# Altium PCB Core.PcbDoc (part 2 of 4)
Units mil, origin at the board's own origin, x right, y up, seen from the top; angles counter-clockwise.
Board outline 3055.22 x 2665.85 mil, 4 copper layers (Top Layer, Layer 1, Layer 2, Bottom Layer), stack 61.583 mil thick; 290 components, 231 nets, 1079 pads, 581 vias.
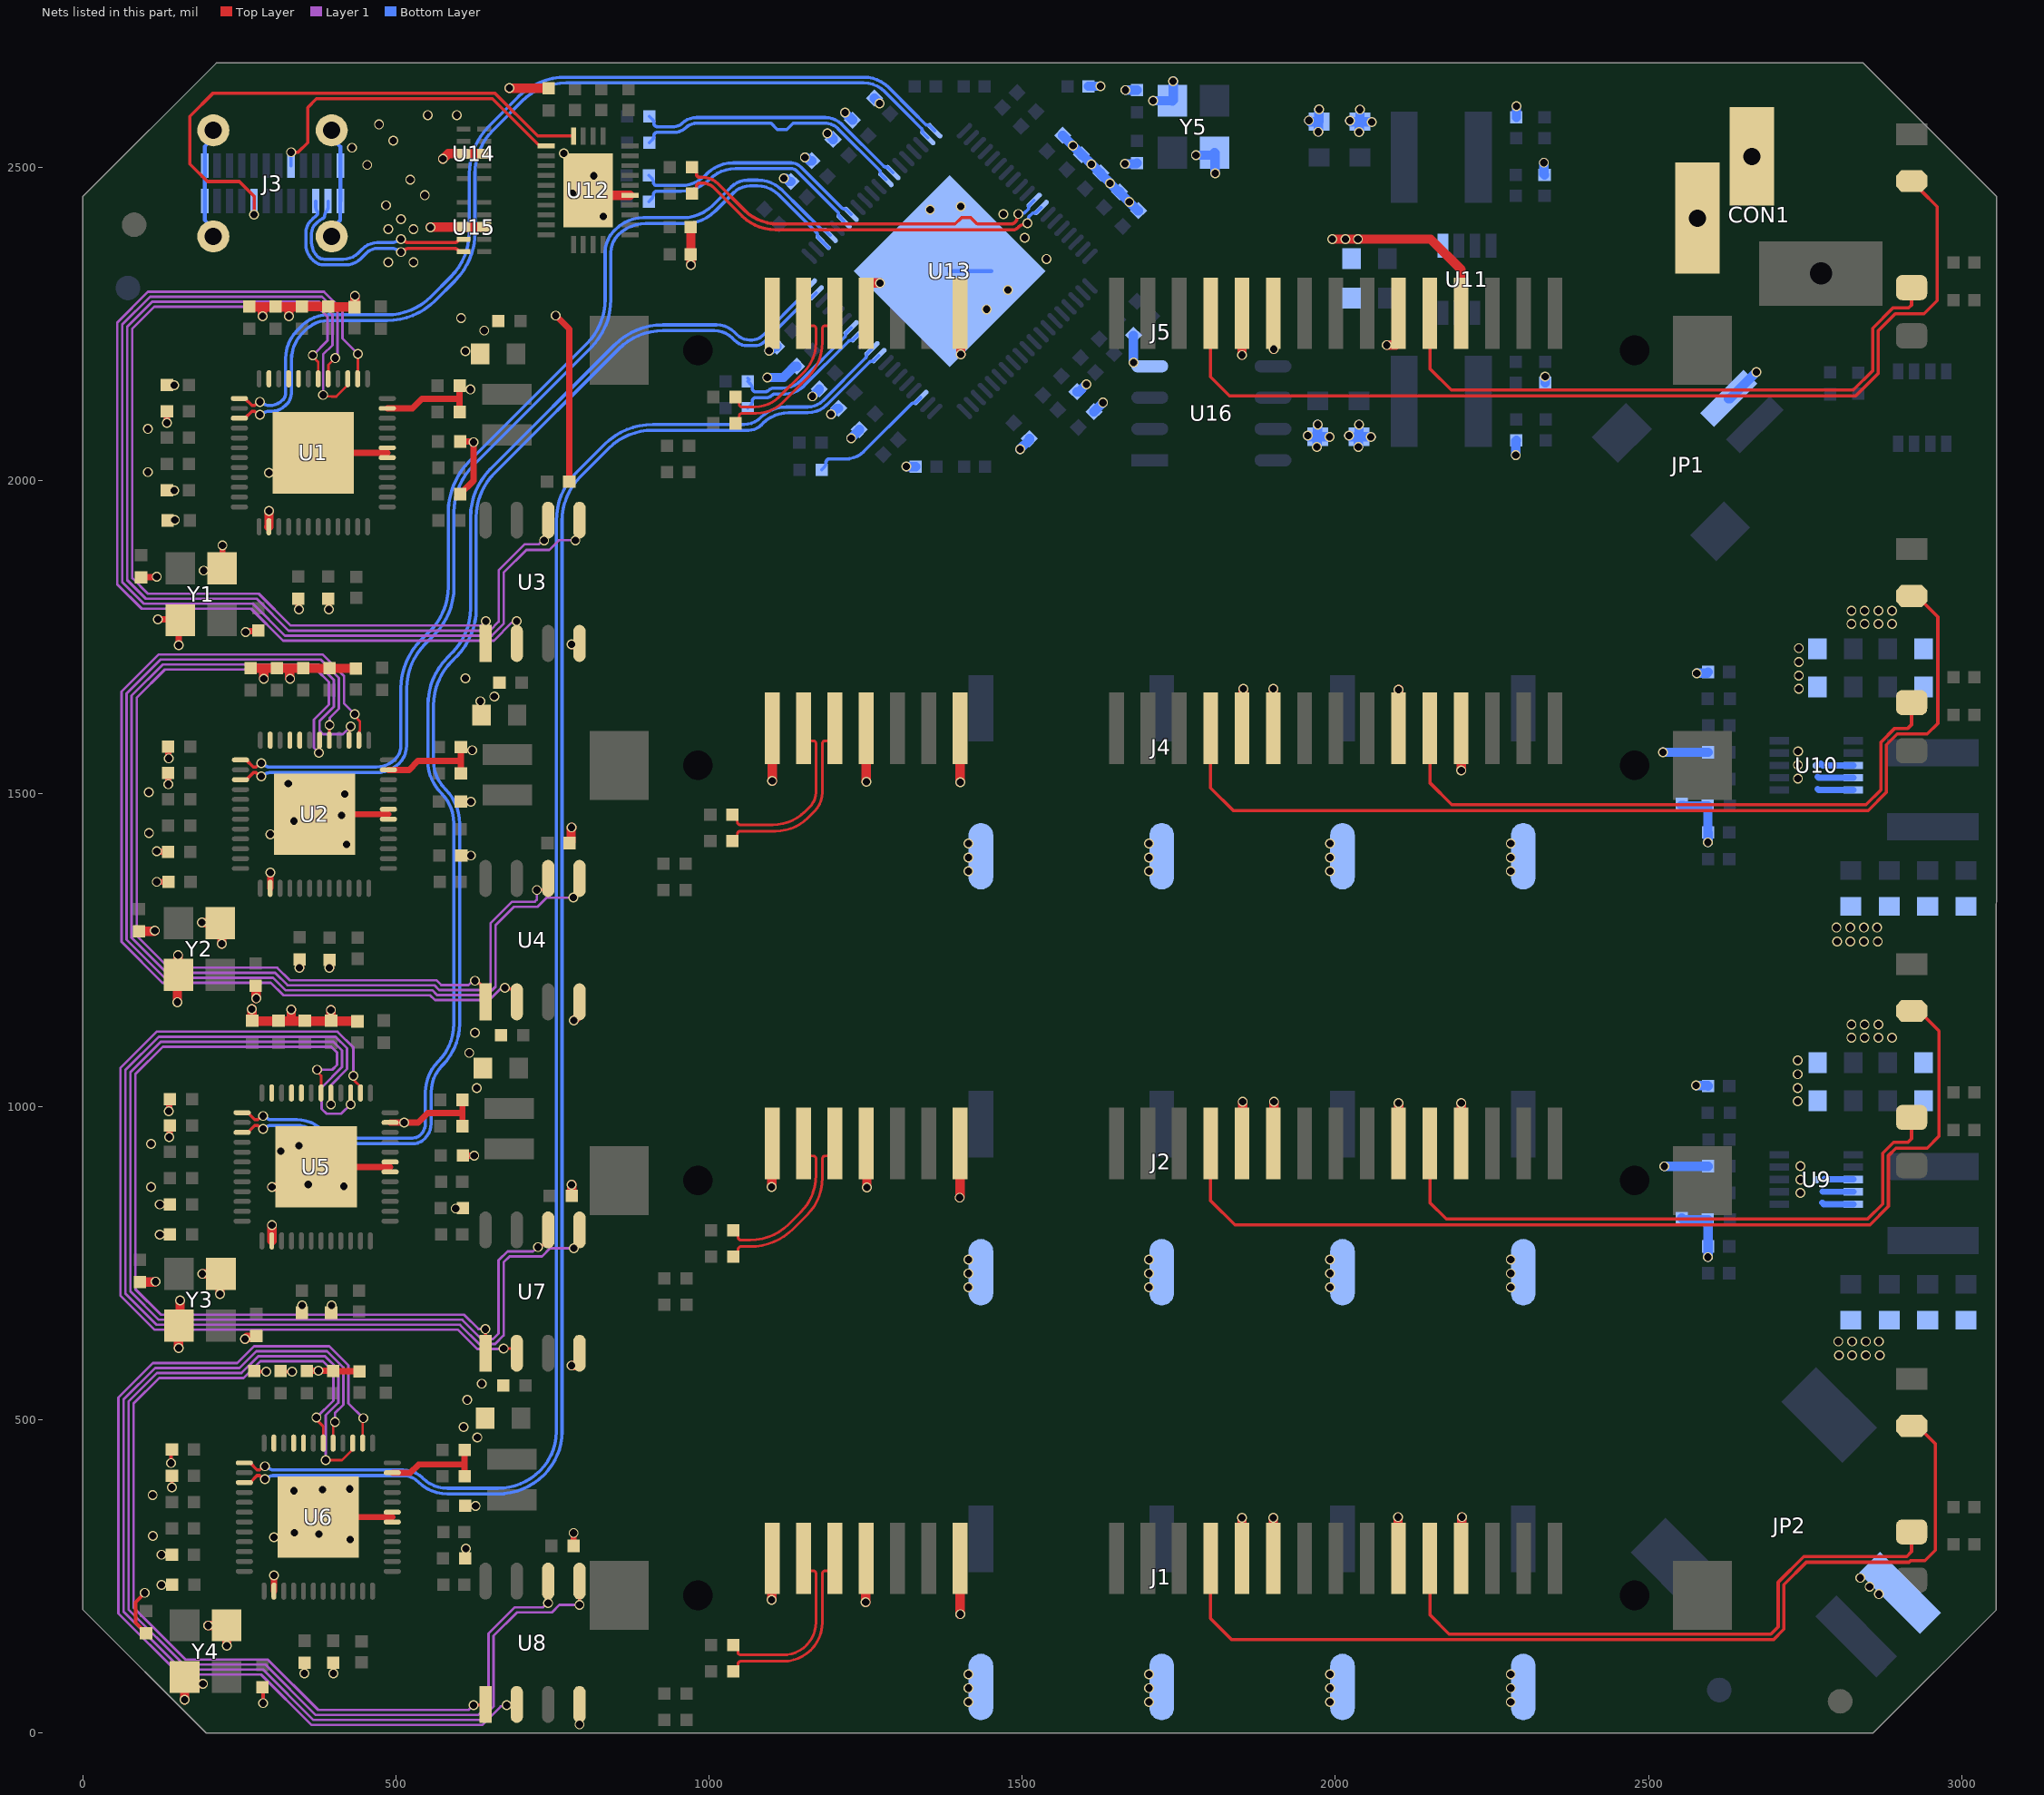
[diagram p4: the nets of this part, all layers, seen from the top]

## Via types
v1: diameter 15.75, hole 11.81, Top Layer to Bottom Layer, tented both sides, 581 vias

## Nets (pads, with @x,y where several pads share a name; then routed paths per layer and width w, separated by ;. In a path a pad name is that pad's centre, name@x,y a point inside that pad or via, vN(x,y) a via of type N, cw(c..) or ccw(c..) an arc to the next point about the centre after c; other vN are vias at no path point) (continued)
cap_SSTX1_P: C132.2 U13.3 | length 206.9
  Bottom Layer w5.15: C132.2@1179.72,2017 1183.27,2020.55 ccw(c1174.99,2028.83) 1186.7,2028.83 cw(c1191.85,2028.83) 1188.2,2032.47 ; 1188.21,2032.48 cw(c1191.85,2028.83) 1191.85,2033.98 1197.64,2033.98 1197.7,2033.92 1217.79,2033.92 ccw(c1217.79,2075.81) 1247.39,2046.18 1322.9,2121.68 cw(c1326.85,2117.73) U13.3@1326.82,2123.32 ; U13.3@1326.85,2123.32 ccw(c1326.85,2128.91) 1330.8,2124.95 U13.3@1338.04,2132.19
cap_SSTX2_N: C137.2 U13.13 | length 220.4
  Bottom Layer w5.15: C137.2@1061.72,2158 C137.2@1065.84,2153.88 ; C137.2@1061.72,2163 C137.2@1064.22,2160.5 ; C137.2@1065.85,2153.87 cw(c1058.24,2146.28) 1068.98,2146.28 ccw(c1074.13,2146.28) 1070.48,2142.65 ccw(c1074.13,2146.28) 1074.13,2141.13 1088.59,2141.13 ccw(c1088.59,2151.15) 1095.67,2144.07 cw(c1102.75,2136.99) 1102.75,2147 1117,2147 ccw(c1117,2190.17) 1147.52,2159.64 1216.23,2228.35 ccw(c1212.28,2232.3) 1217.87,2232.3 cw(c1223.46,2232.3) 1219.49,2236.24 U13.13@1226.74,2243.49
cap_SSTX2_P: C136.2 U13.12 | length 224.4
  Bottom Layer w5.15: C136.2@1062,2115 1065.56,2118.56 ccw(c1057.28,2126.83) 1068.98,2126.83 cw(c1074.13,2126.83) 1070.48,2130.47 ; 1070.49,2130.48 cw(c1074.13,2126.83) 1074.13,2131.98 1092.38,2131.98 ccw(c1092.38,2142) 1099.46,2134.92 cw(c1106.54,2127.84) 1106.54,2137.85 1120.79,2137.85 ccw(c1120.79,2181.02) 1151.3,2150.48 1222.7,2221.88 cw(c1226.65,2217.93) 1226.65,2223.52 ccw(c1226.65,2229.11) 1230.59,2225.14 U13.12@1237.84,2232.39
cap_SSTX3_N: C139.2 U13.26 | length 375.3
  Bottom Layer w5.15: C139.2@903.72,2487 908.15,2482.57 cw(c901.31,2475.73) 910.98,2475.73 ccw(c916.13,2475.73) 912.48,2472.09 ccw(c916.13,2475.72) 916.13,2470.57 955.16,2470.57 ccw(c955.16,2524.84) 993.51,2486.45 ; 993.53,2486.47 996.21,2489.15 cw(c1038.58,2446.78) 1038.58,2506.7 1131,2506.7 cw(c1131,2485.35) 1146.1,2500.44 1211.5,2435.05 ccw(c1215.52,2439.06) U13.26@1215.52,2433.38 ; U13.26@1215.55,2433.38 cw(c1215.52,2427.71) U13.26@1219.5,2431.75 ; U13.26@1219.53,2431.72 U13.26@1226.74,2424.51
cap_SSTX3_P: C138.2 U13.25 | length 367.7
  Bottom Layer w5.15: C138.2@903.72,2445 908.15,2449.43 ccw(c901.31,2456.27) 910.98,2456.27 cw(c916.13,2456.27) 912.48,2459.91 cw(c916.13,2456.28) 916.13,2461.43 955.21,2461.43 ccw(c955.21,2524.72) 999.96,2479.96 1000,2480 cw(c1042.37,2437.63) 1042.37,2497.55 1130.94,2497.55 cw(c1130.94,2485.21) 1139.67,2493.93 1205.03,2428.57 ; 1205.03,2428.57 cw(c1201.02,2424.56) U13.25@1206.69,2424.59 ; U13.25@1206.69,2424.56 ccw(c1212.37,2424.56) 1208.35,2420.56 U13.25@1215.57,2413.34
cap_SSTX4_N: C141.2 U13.32 | length 436.5
  Bottom Layer w5.15: C141.2@904.72,2581 909.15,2576.57 cw(c902.31,2569.73) 911.98,2569.73 ccw(c917.13,2569.73) 913.48,2566.09 ccw(c917.13,2569.72) 917.13,2564.57 944.63,2564.57 ccw(c944.63,2581.49) 956.57,2569.51 ; 956.62,2569.56 cw(c979.82,2546.3) 979.82,2579.15 1185.24,2579.15 cw(c1185.24,2541.17) 1212.09,2568.03 1278.35,2501.77 ccw(c1282.3,2505.72) U13.32@1282.3,2500.13 ; U13.32@1282.34,2500.13 cw(c1282.3,2494.54) 1286.23,2498.52 U13.32@1293.49,2491.26
cap_SSTX4_P: C140.2 U13.31 | length 437.6
  Bottom Layer w5.15: C140.2@904.72,2539 909.15,2543.43 ccw(c902.31,2550.27) 911.98,2550.27 cw(c917.13,2550.27) 913.48,2553.91 cw(c917.13,2550.28) 917.13,2555.43 944.71,2555.43 ccw(c944.71,2581.29) 963,2563 cw(c979.9,2546.1) 979.9,2570 1084,2570 1099,2570 1109,2560 1124,2560 1134,2570 1185.18,2570 cw(c1185.18,2541.03) 1190.96,2569.42 cw(c1185.18,2541.03) 1205.66,2561.51 1271.88,2495.3 ; 1271.91,2495.27 cw(c1267.93,2491.35) U13.31@1273.52,2491.38 ; U13.31@1273.52,2491.35 ccw(c1279.11,2491.35) 1275.15,2487.39 U13.31@1282.39,2480.16
cap_SSTX_N: C135.2 U13.49 | length 612.2
  Top Layer w5.15: C135.2@972.72,2500 977.15,2495.57 cw(c970.31,2488.73) 979.98,2488.73 ccw(c985.13,2488.73) 981.48,2485.09 ccw(c985.13,2488.72) 985.13,2483.57 990.09,2483.57 cw(c990.09,2449.81) 1013.96,2473.69 1056.33,2431.33 ; 1056.35,2431.3 ccw(c1109.86,2484.86) 1109.86,2409.15 1378,2409.15 1393,2409.15 1403,2419.15 1418,2419.15 1428,2409.15 1476,2409.15 1481.8,2409.15 ccw(c1481.8,2419.42) 1489.05,2412.14 ; 1489.08,2412.17 ccw(c1481.8,2419.42) 1492.07,2419.42 1492.07,2420.85 cw(c1498.15,2420.85) v1(1493.85,2425.15)
  Bottom Layer w5.15: v1(1493.85,2425.15) 1495.63,2426.93 1503.83,2426.93 1510.11,2433.21 1510.11,2437.91 U13.49@1518.99,2446.78
cap_SSTX_P: C134.2 U13.50 | length 611.8
  Top Layer w5.15: C134.2@972.72,2458 977.15,2462.43 ccw(c970.31,2469.27) 979.98,2469.27 cw(c985.13,2469.27) 981.48,2472.91 cw(c985.13,2469.28) 985.13,2474.43 990,2474.43 cw(c990,2449.59) 1007.54,2467.17 1052.54,2422.18 ; 1052.56,2422.15 ccw(c1106.07,2475.71) 1106.07,2400 1486.08,2400 ccw(c1486.08,2409.09) 1492.51,2402.66 1494.52,2404.68 ; 1494.53,2404.68 cw(c1504.23,2394.97) 1504.23,2408.7 ccw(c1504.23,2414.77) v1(1508.52,2410.48)
  Bottom Layer w5.15: v1(1508.52,2410.48) 1510.3,2412.26 1510.3,2420.46 1516.58,2426.74 1521.29,2426.74 U13.50@1530.16,2435.61
cap_TX1_N: C3.1 J1.S3 | length 300.3
  Top Layer w4.29: C3.1@1038.43,99 1043.44,104 ccw(c1036.94,110.51) 1046.13,110.51 cw(c1050.42,110.51) 1047.39,113.54 cw(c1050.42,110.51) 1050.42,114.8 1118.59,114.8 ccw(c1118.59,176.99) 1162.56,133.01 1162.67,133.12 ccw(c1118.56,177.23) 1162.75,133.2 ccw(c1118.56,177.23) 1180.95,177.23 1180.95,254.97 cw(c1185.24,254.97) 1182.2,258 cw(c1185.24,254.97) 1185.24,259.26 1187.3,259.26 ccw(c1187.3,268.53) 1193.85,261.97 1195.97,264.09 ccw(c1184.3,275.76) 1200.8,275.76 J1.S3@1200.8,279.12
cap_TX1_P: C1.1 J1.S2 | length 284.1
  Top Layer w4.29: C1.1@1038.72,141 1043.15,136.56 cw(c1035.97,129.38) 1046.13,129.38 ccw(c1050.42,129.38) 1047.39,126.34 ccw(c1050.42,129.38) 1050.42,125.09 1118.47,125.09 ccw(c1118.47,177.27) 1155.37,140.37 ; J1.S2@1150.8,279.12 1150.8,275.76 ccw(c1167.3,275.76) 1155.63,264.09 1157.75,261.97 ccw(c1164.31,268.53) 1164.31,259.26 1166.37,259.26 cw(c1166.37,254.97) 1169.4,258 cw(c1166.37,254.97) 1170.66,254.97 1170.66,177.27 cw(c1118.47,177.27) 1155.39,140.39
cap_TX2_N: C4.1 J2.S3 | length 275.5
  Top Layer w4.29: C4.1@1038.72,761 1043.69,765.97 ccw(c1037.08,772.56) 1044.32,766.68 ccw(c1037.08,772.56) 1046.41,772.56 cw(c1050.7,772.56) 1047.67,775.6 cw(c1050.7,772.57) 1050.7,776.86 1065.86,776.86 ccw(c1065.86,873.92) 1134.49,805.28 1156.27,827.06 ccw(c1096.7,886.63) 1180.95,886.63 1180.95,917.29 cw(c1185.24,917.29) 1182.2,920.33 cw(c1185.24,917.29) 1185.24,921.58 1187.3,921.58 ccw(c1187.3,930.85) 1193.85,924.3 1195.97,926.42 ccw(c1184.3,938.08) 1200.8,938.08 J2.S3@1200.8,941.44
cap_TX2_P: C2.1 J2.S2 | length 258.9
  Top Layer w4.29: C2.1@1038.72,803 1043.69,798.03 cw(c1037.08,791.44) 1044.32,797.32 cw(c1037.08,791.44) 1046.41,791.44 ccw(c1050.7,791.44) 1047.67,788.4 ccw(c1050.7,791.43) 1050.7,787.14 1065.72,787.14 ccw(c1065.72,874.26) 1127.32,812.66 1145.98,831.33 ccw(c1086.41,890.89) 1170.66,890.89 1170.66,917.29 ccw(c1166.37,917.29) 1169.4,920.33 ccw(c1166.37,917.29) 1166.37,921.58 1164.31,921.58 cw(c1164.31,930.85) 1157.75,924.3 1155.63,926.42 cw(c1167.3,938.08) 1150.8,938.08 J2.S2@1150.8,941.44
cap_TX3_N: C11.1 J4.S3 | length 297
  Top Layer w4.29: C11.1@1037.43,1424 1042.4,1428.96 ccw(c1035.79,1435.56) 1043.04,1429.68 ccw(c1035.79,1435.56) 1045.13,1435.56 cw(c1049.42,1435.56) 1046.39,1438.6 cw(c1049.42,1435.57) 1049.42,1439.86 1106.26,1439.86 ccw(c1106.26,1512.63) 1157.7,1461.14 1168.53,1471.98 ccw(c1138.57,1501.95) 1180.95,1501.95 1180.95,1579.89 cw(c1185.24,1579.89) 1182.2,1582.92 ; 1182.2,1582.93 cw(c1185.24,1579.89) 1185.24,1584.18 1187.3,1584.18 ccw(c1187.3,1593.45) 1193.85,1586.9 1195.97,1589.02 ccw(c1184.3,1600.68) 1200.8,1600.68 J4.S3@1200.8,1604.04
cap_TX3_P: C9.1 J4.S2 | length 280.4
  Top Layer w4.29: C9.1@1037.43,1466 1042.4,1461.04 cw(c1035.79,1454.44) 1043.04,1460.32 cw(c1035.79,1454.44) 1045.13,1454.44 ccw(c1049.42,1454.44) 1046.39,1451.4 ccw(c1049.42,1454.43) 1049.42,1450.14 1102,1450.14 ccw(c1102,1522.92) 1153.43,1471.43 1161.22,1479.22 ccw(c1138.44,1502) 1163.15,1481.33 ccw(c1138.44,1502) 1170.66,1502 1170.66,1579.89 ccw(c1166.37,1579.89) 1169.4,1582.92 ; J4.S2@1150.8,1604.04 1150.8,1600.68 ccw(c1167.3,1600.68) 1155.63,1589.02 1157.75,1586.9 ccw(c1164.31,1593.45) 1164.31,1584.18 1166.37,1584.18 cw(c1166.37,1579.89) 1169.4,1582.93
cap_TX4_N: C12.1 J5.S3 | length 266.3
  Top Layer w4.29: C12.1@1042.43,2091 1043.83,2092.39 ccw(c1033.66,2102.56) 1048.04,2102.56 cw(c1052.33,2102.56) 1049.3,2105.6 cw(c1052.33,2102.57) 1052.33,2106.86 1075.31,2106.86 ccw(c1075.31,2166.62) 1117.56,2124.35 1158.13,2164.92 ccw(c1103.05,2220) 1158.22,2165.01 ccw(c1103.05,2220) 1180.95,2220 1180.95,2242.49 cw(c1185.24,2242.49) 1182.2,2245.52 cw(c1185.24,2242.49) 1185.24,2246.78 1187.3,2246.78 ccw(c1187.3,2256.05) 1193.85,2249.49 1195.97,2251.61 ccw(c1184.3,2263.28) 1200.8,2263.28 J5.S3@1200.8,2266.64
cap_TX4_P: C10.1 J5.S2 | length 250
  Top Layer w4.29: C10.1@1042.43,2133 1043.83,2131.61 cw(c1033.66,2121.44) 1048.04,2121.44 ccw(c1052.33,2121.44) 1049.3,2118.4 ccw(c1052.33,2121.43) 1052.33,2117.14 1073.18,2117.14 ccw(c1073.18,2171.76) 1111.8,2133.14 1150.83,2172.17 ; J5.S2@1150.8,2266.64 1150.8,2263.28 ccw(c1167.3,2263.28) 1155.63,2251.61 1157.75,2249.49 ccw(c1164.31,2256.05) 1164.31,2246.78 1166.37,2246.78 cw(c1166.37,2242.49) 1169.4,2245.52 cw(c1166.37,2242.49) 1170.66,2242.49 1170.66,2220.04 cw(c1102.96,2220.04) 1150.86,2172.2
DAS1: J1.P11 LED8.2 | length 997.4
  Top Layer w5.15: J1.P11@2150.8,277.23 2150.8,189.2 2181.63,158.37 2695.37,158.37 2707,170 2707,241 2748.15,282.15 2912.15,282.15 2920,290 LED8.2@2920,321.33
DAS2: J2.P11 LED6.2 | length 1007
  Top Layer w5.15: J2.P11@2150.8,939.55 2150.8,847.2 2177.31,820.69 2849.75,820.69 2873.85,844.79 2873.85,925.79 2891.21,943.15 2914.15,943.15 2920,949 LED6.2@2920,982.87
DAS3: J4.P11 LED4.2 | length 1001.5
  Top Layer w5.15: J4.P11@2150.8,1602.15 2150.8,1517.2 2186,1482 2847.06,1482 2870.85,1505.79 2870.85,1581.79 2893.17,1604.11 2914.11,1604.11 2920,1610 LED4.2@2920,1645.19
DAS4: J5.P11 LED2.2 | length 993.7
  Top Layer w5.15: J5.P11@2150.8,2264.75 2150.8,2178.2 2185,2144 2827,2144 2857.85,2174.85 2857.85,2242.79 2890.21,2275.15 2915.36,2275.15 2920,2279.79 LED2.2@2920,2307.51
GND: C17.1 C18.1 C19.1 C20.1 C21.1 C22.1 C25.1 C26.1 C27.1 C28.1 C29.1 C30.1 C31.1 C32.1 C33.1 C34.1 C35.1 C36.1 C37.1 C38.1 C39.1 C40.1 C41.1 C42.1 C43.1 C44.1 C45.1 C46.1 C47.1 C48.1 C49.1 C50.1 C55.2 C56.2 C57.2 C58.2 C59.1 C60.1 C61.1 C62.1 C63.1 C64.1 C67.1 C68.1 C69.1 C70.1 C71.1 C72.1 C73.1 C74.1 C75.1 C76.1 C77.1 C78.1 C79.1 C80.1 C81.1 C82.1 C83.1 C84.1 C85.1 C86.1 C87.1 C88.1 C89.1 C90.1 C91.1 C92.1 C97.2 C98.2 C99.2 C100.2 C102.1 C103.1 C104.1 C105.1 C106.1 C107.1 C108.1 C109.1 C110.1 C111.1 C113.1 C114.1 C115.1 C116.1 C117.1 C118.1 C119.1 C120.1 C121.1 C122.1 C123.1 C124.1 C125.1 C126.1 C127.1 C128.1 C129.1 C131.2 C142.2 C143.2 C144.1 C145.1 C146.1 C147.1 C148.1 C149.1 C150.1 C151.1 C152.1 C153.1 C154.1 C155.1 C156.1 C157.1 C158.1 C159.1 C160.1 C161.1 C162.1 C163.1 C164.1 CON1.2 CON1.3 E1.2 E2.2 E3.2 E4.2 E5.2 E6.2 E7.2 E8.2 E9.2 E10.2 E11.2 E12.2 J1.P5 J1.P6 J1.P10 J1.P12 J1.S1 J1.S4 J1.S7 J2.P5 J2.P6 J2.P10 J2.P12 J2.S1 J2.S4 J2.S7 J3.A1 J3.A12 J3.B1 J3.B12 J3.SH1 J3.SH2 J3.SH3 J3.SH4 J4.P5 J4.P6 J4.P10 J4.P12 J4.S1 J4.S4 J4.S7 J5.P5 J5.P6 J5.P10 J5.P12 J5.S1 J5.S4 J5.S7 JP1.2 JP2.2 R5.1 R6.1 R13.1 R14.1 R21.2 R22.2 R23.2 R27.2 R28.2 R29.2 R32.2 R33.2 R36.2 R37.2 R44.2 R46.1 R48.1 R49.2 R53.2 U1.26 U1.42 U1.43 U1.47 U1.49 U2.26 U2.42 U2.43 U2.47 U2.49 U3.4 U4.4 U5.26 U5.42 U5.43 U5.47 U5.49 U6.26 U6.42 U6.43 U6.47 U6.49 U7.4 U8.4 U9.3 U9.4 U9.5 U9.11 U10.3 U10.4 U10.5 U10.11 U11.5 U12.19 U12.29 U13.77 U14.3 U14.8 U15.3 U15.8 U16.4 Y1.2 Y1.4 Y2.2 Y2.4 Y3.2 Y3.4 Y4.2 Y4.4 Y5.2 Y5.4 | length 8823.8
  Top Layer w6: v1(99,224) 84.16,209.16 84.16,176.41 C99.2@101,159.57 ; v1(125.55,285) C76.1@142.28,285 ; v1(125.84,237) C82.1@142.57,237 ; v1(140.89,431.17) C91.1@140.89,451.61 ; v1(142.28,392.72) C81.1@142.28,411 ; C88.1@274,578.44 275.21,577.23 v1(292.7,577.23) ; C100.2@287,73.28 288,72.28 v1(288,48) ; C78.1@316,578.44 317.31,577.13 v1(334.46,577.13) ; v1(354,95.55) C79.1@354,112.28 ; v1(400,95.55) C80.1@400,112.28 ; C77.1@400,578.44 C77.1@400.31,578.12 ; v1@523,2479 v1(523,2480) ; v1(546,2455) v1@546,2456 ; C60.1@610.43,279 611.52,280.08 v1(611.52,294.48) ; C75.1@610.43,363 v1(627.16,363)
  Top Layer w10: C55.2@93,1845.28 93.36,1845.64 117.68,1845.64 v1(118.04,1846) ; v1(118,1359) C33.1@136.57,1359 ; v1(118,1408) 118.5,1407.5 135.78,1407.5 C36.1@136.28,1407 ; v1(120,1778) 154.2,1778 Y1.2@155.54,1776.66 153,1774.13 v1(153,1736.87) ; v1(123,796) C73.1@139.11,796 ; v1(123,844) C67.1@138.83,844 ; C28.1@134.28,1984 v1(146,1984) ; v1(134.28,2091.72) C30.1@134.28,2110 ; C43.1@134.28,2152 v1(146,2152) ; C25.1@135.28,1936 135.53,1936.25 146.75,1936.25 v1(147,1936.5) ; C35.1@136.28,1533 136.46,1532.83 136.46,1514.89 v1(136.63,1514.72) ; C48.1@136.28,1575 136.64,1574.64 136.64,1556.36 v1(137,1556) ; v1(137,993) 137.91,993.91 137.91,1011.09 C87.1@138.83,1012 ; v1(138,951.73) 138.41,952.14 138.41,969.59 C69.1@138.83,970 ; v1(193.03,1856) 219.13,1856 Y1.4@222.46,1859.34 223,1859.87 v1(223,1896) ; v1(259.96,1758) 261.06,1759.1 278.82,1759.1 C56.2@280,1760.28 ; v1(297.46,2012) 336,2012 U1.49@368,2044 486.11,2044 ; U2.26@299.13,1348.89 299.3,1349.05 299.3,1373.84 v1(299.46,1374) ; v1(299.46,1435) 338,1435 U2.49@370,1467 488.11,1467 ; U6.26@305.13,226.89 305.3,227.05 305.3,251.84 v1(305.46,252) ; C26.1@344,1811.28 344.5,1810.78 344.5,1794.5 v1(345,1794) ; v1(350,683) v1(350,683) 350.04,671.33 C74.1@350.09,671.28 ; C92.1@358,578.43 v1(376,578.43) C77.1@400,578.44 ; U5.49@372.54,904 490.65,904 ; U6.49@376,345 494.11,345 ; C31.1@392,1811.28 392.5,1810.78 392.5,1794.5 v1(393,1794) ; C68.1@396.54,671.28 396.77,671.51 396.77,682.77 v1(397,683) ; C77.1@400.31,578.12 400.56,577.88 441.44,577.88 R14.1@442,577.32 ; U1.47@486.11,2114.87 526.48,2114.87 541.62,2130 601.72,2130 ; U2.47@488.11,1537.87 520.85,1537.87 534.98,1552 602.72,1552 603.72,1553 ; U5.47@490.65,974.87 v1(513.09,974.87) 535.53,974.87 550.67,990 606.26,990 ; U6.47@494.11,415.87 522.89,415.87 536.02,429 607.72,429 609.72,431 ; v1(595.26,837.5) 595.51,837.75 606.73,837.75 C59.1@606.98,838 ; C42.1@601.72,2109 601.72,2130 ; C44.1@601.72,2151 601.72,2130 ; C17.1@602.43,1978 623.76,1999.32 v1(623.76,2060.91) ; C32.1@602.43,2062 v1@621.26,2062 ; C37.1@603.72,1487 v1(619.55,1487) ; C47.1@603.72,1532 603.72,1553 ; C50.1@603.72,1574 603.72,1553 ; C18.1@604.43,1401 v1(619.55,1401) ; C83.1@606.26,969 606.26,990 ; C163.1@606.26,1011 606.26,990 ; C70.1@606.98,922 v1(625,922) ; C89.1@609.72,410 609.72,431 ; C90.1@609.72,452 609.72,431 ; v1(755,2263) 776.72,2241.28 C161.1@776.72,1998 C161.1@776.36,1998.36 ; C164.1@783.72,299 v1(783.72,319.72) ; v1(793,14) U8.4@793,46
  Top Layer w15: C57.2@90,1280.28 114.12,1280.28 114.84,1281 v1(115.04,1281) ; C97.2@91,720.28 115.12,720.28 115.84,721 v1(116.04,721) ; v1(151,1167) 151,1209.13 Y2.2@152.54,1210.66 ; Y2.2@152,1211 v1(152,1242) ; v1(153,615) 153,650.13 155.41,652.53 v1(155.41,690.71) ; v1(162.54,53.37) Y4.2@162.54,89.66 173.41,78.78 v1(191.97,78.78) ; v1(190.03,1294) 218.8,1294 Y2.4@219.46,1293.34 222,1290.8 v1(222,1260.02) ; v1(191.03,733.34) Y3.4@220.46,733.34 219,731.87 v1(219,701.22) ; v1(200.03,172) 229.13,172 Y4.4@229.46,172.34 230,171.8 v1(230,139.87) ; v1(259,629.13) 259.2,629.13 262.02,631.94 274.66,631.94 C98.2@277,634.28 ; C41.1@266,2278 267.12,2276.88 287,2276.88 ; C46.1@268,1700.44 268.56,1699.88 291.14,1699.88 ; v1(270,1156) 270.14,1155.86 270.14,1137.84 C84.1@270.54,1137.44 271.1,1136.88 332.82,1136.88 ; C58.2@276,1193 276.86,1192.14 276.86,1173.14 v1(277,1173) ; v1(287,2261.87) 287,2276.88 ; v1(289,1683.13) 289.14,1683.27 289.14,1697.88 291.14,1699.88 ; U1.26@297.13,1925.89 297.31,1926.07 297.31,1950.86 v1(297.46,1951) ; U5.26@301.68,785.89 301.86,786.07 301.86,810.86 v1(302,811) ; v1(302,872) 340.54,872 U5.49@372.54,904 ; v1(329,2261.87) 329.14,2262.02 329.14,2274.14 331.88,2276.88 ; v1(331.03,1683.13) v1(331.03,1683.13) 330.28,1683.82 330.28,1697.16 333,1699.88 ; v1(333,1155) 332.86,1154.86 332.86,1136.92 332.82,1136.88 ; v1(345.96,1221.87) C40.1@346,1235.28 ; C27.1@390.12,2276.88 390.12,2276.97 389.66,2277.44 350.56,2277.44 350,2276.88 331.88,2276.88 ; C27.1@392,2276.88 433.44,2276.88 R5.1@433.53,2276.79 ; v1(393.78,1221.87) 393.89,1221.98 393.89,1234.17 C38.1@394,1234.28 ; C39.1@394,1699.88 333,1699.88 ; C39.1@394,1700.44 394.56,1699.88 435.44,1699.88 R6.1@436,1699.32 ; C72.1@396,1136.88 332.82,1136.88 ; v1(396.14,1154.64) 396.29,1154.49 396.29,1137.69 C72.1@396.54,1137.44 ; C72.1@396.54,1136.88 437.99,1136.88 R13.1@438.54,1136.32 ; R5.1@434,2276.32 R5.1@433.53,2276.79 ; v1(434.52,2294.52) 434.37,2294.37 434.37,2277.63 R5.1@433.53,2276.79 ; v1(555,2404) 555.2,2404 555.52,2404.32 U15.8@608,2404.32 U15.3@640.87,2404.32 ; v1(575,2513) 575.2,2513 583.57,2521.37 U14.8@608,2521.37 U14.3@640.87,2521.37 ; v1(681,2626) 681.2,2626 681.49,2625.72 C129.1@744,2625.72 ; C162.1@777.43,1421 779.78,1423.34 779.78,1444.97 780.6,1445.8 v1(780.6,1446) ; v1(780.6,587) 780.74,587.14 790.84,587.14 793,589.31 U7.4@793,606.57 ; v1(780.6,875.76) 780.66,875.7 780.66,858.06 C85.1@780.72,858 ; v1(780.6,1738) 780.74,1738.14 791.57,1738.14 U3.4@793,1739.57 ; v1(784.14,1137.77) 792.1,1145.73 792.1,1166.68 U4.4@793,1167.57 ; U12.29@807,2463 U12.29@814.87,2455.13 ; v1(831,2421) 831,2439 U12.29@814.87,2455.13 ; U12.19@873.93,2455.13 U12.29@814.87,2455.13 ; R46.1@970.73,2404 970.87,2403.87 970.87,2344.05 v1(971,2343.92) ; v1(1100,213) 1100.14,213.14 1100.14,279.4 J1.S1@1100.8,280.06 ; v1(1100,872) 1100.14,872.14 1100.14,941.73 J2.S1@1100.8,942.38 ; v1(1100.8,1520) J4.S1@1100.8,1604.04 J4.S1@1100.8,1604.98 ; v1(1250,209) 1250.14,209.14 1250.14,278.46 J1.S4@1250.8,279.12 ; J2.S4@1250.8,941.44 1251.86,940.38 1251.86,871.14 v1(1252,871) ; J4.S4@1250.8,1604.04 1250.9,1603.94 1250.9,1519.1 v1(1251,1519) ; J5.S4@1250.8,2266.64 1250.8,2310.69 1255.11,2315 v1(1273,2315) ; v1(1400,855) 1400,855.2 1400.8,856 J2.S7@1400.8,941.44 ; J1.S7@1400.8,279.12 1400.9,279.02 1400.9,190.1 v1(1401,190) ; J4.S7@1400.8,1604.04 1400.9,1603.94 1400.9,1518.1 v1(1401,1518) ; J5.S7@1400.8,2266.64 1401.86,2265.58 1401.86,2201.14 v1(1402,2201) ; J1.P5@1850.8,278.17 1850.9,278.27 1850.9,343.9 v1(1851,344) ; J2.P5@1850.8,940.49 1851.86,941.55 1851.86,1007.86 v1(1852,1008) ; J4.P5@1850.8,1603.09 1852.86,1605.15 1852.86,1666.86 v1(1853,1667) ; J5.P5@1850.8,2265.69 1850.9,2265.59 1850.9,2200.1 v1(1851,2200) ; J1.P6@1900.8,278.17 1900.9,278.27 1900.9,343.9 v1(1901,344) ; J2.P6@1900.8,940.49 1901.86,941.55 1901.86,1007.86 v1(1902,1008) ; J4.P6@1900.8,1603.09 1900.9,1603.19 1900.9,1666.9 v1(1901,1667) ; J5.P6@1900.8,2265.69 1901.54,2264.96 1901.54,2209.48 v1(1901.68,2209.33) ; v1(1995,2385) v1(2016,2385) v1(2036,2385) 2152,2385 2200.8,2336.2 J5.P12@2200.8,2266.64 J5.P12@2200.8,2264.75 ; v1(2082,2215.87) 2096.49,2215.87 2100.8,2220.18 J5.P10@2100.8,2264.75 ; v1(2100,345) 2100.14,344.86 2100.14,277.88 J1.P10@2100.8,277.23 ; J2.P10@2100.8,939.55 2100.9,939.65 2100.9,1005.9 v1(2101,1006) ; J4.P10@2100.8,1602.15 2100.9,1602.25 2100.9,1665.9 v1(2101,1666) ; J1.P12@2200.8,277.23 2201.86,278.28 2201.86,344.86 v1(2202,345) ; J2.P12@2200.8,939.55 2200.9,939.65 2200.9,1005.9 v1(2201,1006) ; J4.P12@2200.8,1602.15 2200.9,1602.05 2200.9,1537.1 v1(2201,1537) ; 287,2276.88 331.88,2276.88 ; 291.14,1699.88 333,1699.88
  Bottom Layer w6: J3.SH2@208.51,2389.36 208.51,2401.58 194.73,2415.36 J3.B1@194.73,2445.66 J3.A12@194.73,2502.34 194.73,2532.64 208.51,2546.42 J3.SH3@208.51,2558.64 ; J3.SH1@397.49,2389.36 397.49,2401.58 411.01,2415.1 J3.B12@411.01,2445.39 ; J3.SH4@397.49,2558.64 397.49,2546.42 411.27,2532.64 J3.A1@411.27,2502.34 J3.B12@411.27,2445.66 ; U13.77@1384,2338.6 U13.77@1384,2334 U13.77@1450.67,2334
  Bottom Layer w10: 2770,1507 2771.38,1505.62 U10.5@2827.05,1505.62 ; 2770,1527 2771.68,1525.32 U10.4@2827.05,1525.32 ; 2775,1548 2778.01,1544.99 U10.3@2827.05,1544.99 ; 2777,847 2779.38,844.62 U9.5@2827.05,844.62 ; 2778,865 2778.68,864.32 U9.4@2827.05,864.32 ; 2781,885 2782.01,884 U9.3@2827.05,884
  Bottom Layer w15: v1(1093,2164) 1093.14,2164.14 1118.83,2164.14 1136.63,2181.95 C153.1@1139.94,2181.95 ; v1(1095.89,2206.87) 1096.04,2207.01 1097.7,2207.01 1104.63,2213.95 C147.1@1107.94,2213.95 ; v1(1119.47,2482.1) 1119.62,2481.96 1122.73,2481.96 1127.63,2477.05 C146.1@1130.94,2477.05 ; v1(1153,2515.55) 1153.14,2515.41 1155.28,2515.41 1160.63,2510.05 C152.1@1163.94,2510.05 ; v1(1165,2134) 1165,2134.2 1175.94,2145.15 C154.1@1175.94,2145.95 ; v1(1189,2554) 1189,2553.8 1197.94,2544.85 C150.1@1197.94,2544.05 ; v1(1194.64,2105.22) 1194.84,2105.22 1204.57,2114.95 C149.1@1206.94,2114.95 ; v1(1217,2587) C151.1@1228.94,2575.05 ; v1(1227,2067) 1227,2067.2 1239.94,2080.15 C157.1@1239.94,2080.95 ; C158.1@1263.94,2610.05 v1(1272.23,2601.77) ; v1(1315,2022) R44.2@1329.54,2022 ; v1(1496.47,2049.53) 1496.47,2049.73 1511.53,2064.78 C148.1@1511.53,2066.47 ; C144.1@1564.53,2550.53 v1(1581,2534) ; v1(1581,2534) 1581,2533.83 1594.83,2520 R49.2@1594.83,2519.83 1595.33,2519.83 R49.2@1596.16,2519 ; C156.1@1587.53,2141.47 1590.27,2141.47 1602.03,2153.23 v1(1602.23,2153.23) ; R49.2@1595,2519 R49.2@1596.16,2519 ; R53.2@1605.73,2629 v1(1625,2629) ; C131.2@1614.53,2109.53 v1(1629,2124) ; C160.1@1625.53,2490.53 1624.83,2490.53 v1(1610.6,2504.76) ; C160.1@1626,2489 1626,2488.4 1640.2,2474.2 v1(1640.2,2474) 1653.67,2460.53 C155.1@1655.53,2460.53 ; C155.1@1656.76,2458.44 v1(1671,2444.2) 1671.2,2444.2 1684.88,2430.53 C159.1@1685.53,2430.53 ; v1(1664,2505) 1664.14,2505.14 1681.86,2505.14 C143.2@1683,2506.28 ; v1(1665,2623) 1665.14,2622.86 1682.86,2622.86 C142.2@1683,2622.72 ; C145.1@1677.53,2231.47 1677.53,2188.67 1678,2188.2 v1(1678,2188) ; v1(1709,2606) 1739.76,2606 Y5.4@1739.94,2605.81 1741,2606.87 v1(1741,2637.23) ; v1(1777.44,2519) 1802.74,2519 Y5.2@1806.87,2523.13 1808,2522.01 v1(1808,2490) ; v1(1955.72,2071.31) 1955.93,2071.31 1957.93,2069.31 C128.1@1971.06,2069.31 ; v1(1957.72,2574.4) 1957.93,2574.4 1959.93,2572.4 C125.1@1973.06,2572.4 ; v1(1970.6,2053.19) 1970.74,2053.33 1970.74,2069 C128.1@1971.06,2069.31 ; v1(1971.86,2089.02) 1971.73,2088.89 1971.73,2069.99 C128.1@1971.6,2069.86 ; v1(1972.6,2556.27) 1972.74,2556.42 1972.74,2572.09 C125.1@1973.06,2572.4 ; v1(1973.86,2592.11) 1973.73,2591.98 1973.73,2573.07 C125.1@1973.6,2572.94 ; C125.1@1974,2572.54 C125.1@1973.6,2572.94 ; v1(1990.73,2069.31) 1990.58,2069.46 C128.1@1972,2069.46 C128.1@1971.6,2069.86 ; v1(2021.72,2071.31) 2021.93,2071.31 2023.93,2069.31 C127.1@2037.06,2069.31 ; v1(2023.12,2574) 2023.33,2574 2025.33,2572 C126.1@2038.46,2572 ; v1(2036.6,2053.19) 2036.74,2053.33 2036.74,2069 C127.1@2037.06,2069.31 ; v1(2037.86,2089.02) 2037.73,2088.89 2037.73,2069.99 C127.1@2037.6,2069.86 ; v1(2038,2555.87) 2038.14,2556.02 2038.14,2571.69 C126.1@2038.46,2572 ; v1(2039.26,2591.71) 2039.13,2591.58 2039.13,2572.67 C126.1@2039,2572.54 ; v1(2056.73,2069.31) 2056.58,2069.46 C127.1@2038,2069.46 C127.1@2037.6,2069.86 ; v1(2058.13,2572) 2057.98,2572.14 2039.4,2572.14 C126.1@2039,2572.54 ; v1(2288,2040) 2288.14,2040.14 2288.14,2062.68 R33.2@2289,2063.54 ; R32.2@2289,2579.73 v1(2289,2597) ; v1(2333,2507) 2333.14,2506.86 2333.14,2488.59 R36.2@2334,2487.73 ; R37.2@2335,2155.79 v1(2335,2165.54) ; v1(2523,1566) 2523.07,1565.93 2595.2,1565.93 R27.2@2595.27,1565.86 ; v1(2525.12,905) 2595.12,905 R21.2@2595.33,905.21 ; C122.1@2552,1481 2555.28,1481 2555.85,1480.43 C121.1@2594.41,1480.43 2594.84,1480 R29.2@2594.84,1437.28 ; C111.1@2553.06,822.64 2555.91,819.78 C110.1@2594.47,819.78 2594.9,819.35 2594.9,777.5 R23.2@2595.33,777.07 2595.14,776.88 2595.14,760.14 v1(2595,760) ; v1(2576,1034) 2576.14,1033.86 2594.83,1033.86 R22.2@2595.33,1033.35 ; v1(2577,1692) 2577.14,1692.14 2593.41,1692.14 R28.2@2595.27,1694 ; v1(2595,1422) 2595.13,1422.13 2595.13,1436.99 R29.2@2594.84,1437.28 ; R29.2@2595.27,1437.71 R29.2@2594.84,1437.28 ; JP1.2@2627.87,2130.63 2629.77,2130.63 2671.87,2172.72 v1(2672.07,2172.72) ; R49.2@1596.16,2519 1610.39,2504.76 v1(1610.6,2504.76) ; R49.2@1596.16,2519 1596.36,2519 v1(1610.6,2504.76) ; C128.1@1971.06,2069.31 C128.1@1971.6,2069.86 ; C125.1@1973.06,2572.4 C125.1@1973.6,2572.94 ; C127.1@2037.06,2069.31 C127.1@2037.6,2069.86 ; C126.1@2038.46,2572 C126.1@2039,2572.54
  other v1: 1414,50 1702.67,50 1991.33,50 2280,50 1414,72 1702.67,72 1991.33,72 2280,72 1414,94 1702.67,94 1991.33,94 2280,94 2868,222 2853,234 2838,248 427,309 305.46,313 111.62,314.89 377,318 338,320 111.46,380 337,387 383,389 426,390 630,472 608,489 614,532 637,558 2804.06,603.36 2825.06,603.36 2847.06,603.36 2869.06,603.36 2803.06,625.36 2825.06,625.36 2847.06,625.36 2868.06,625.36 1414,712 1702.67,712 1991.33,712 2280,712 1414,734 1702.67,734 1991.33,734 2280,734 1414,756 1702.67,756 1991.33,756 2280,756 2742.63,862.41 109,872 417,873 360,876 2742.63,883.41 2742.63,905.41 316,929 345,938 109,941 2738,1009 629,1030 2738,1030 2738,1052 2738,1074 617,1086 2824.06,1110.36 2845.06,1110.36 2867.06,1110.36 2889.06,1110.36 626,1118 2824.06,1131.36 2845.06,1131.36 2867.06,1131.36 2801,1264 2822,1264 2844,1264 2866,1264 2800,1286 2822,1286 2844,1286 2865,1286 1414,1376 1702.67,1376 1991.33,1376 2280,1376 1414,1398 1702.67,1398 1991.33,1398 2280,1398 421,1419 1414,1420 1702.67,1420 1991.33,1420 2280,1420 105.62,1436.89 337,1456 413,1465 418,1499 105.46,1502 328,1516 2738.57,1523.73 2738.57,1545.69 2738.63,1567.13 622,1569 634.74,1647.25 657,1655 2740,1667 330.97,1683.13 611,1684 2740,1688 2740,1710 2740,1732 2824,1771 2845,1771 2867,1771 2889,1771 2824,1792 2845,1792 2867,1792 2889,1792 104,2013 104,2082 619,2145 611,2206 641,2239 603.97,2259.03 1443,2273 1477,2304 488,2348 528,2348 1538.7,2353.4 1503.85,2387.17 488,2401 528,2401 508,2417 1470,2424.6 1353,2432 1402,2437 484,2439 782,2458 816,2486 454.18,2503.49 768,2522 430,2531 496,2542 473,2568 551,2583 597,2583
GPIO0-A: U1.2 U3.2 | length 1653.5
  Top Layer w4: U1.2@438.87,2162.11 439.12,2162.36 439.12,2201.95 v1(439.17,2202) ; U3.2@693,1739.57 v1(693,1775)
  Layer 1 w4: v1(439.17,2202) 414.66,2226.51 414.66,2271.66 385.16,2301.16 104.16,2301.16 55,2252 55,1834.06 94.06,1795 268.69,1795 319.56,1744.13 656.44,1744.13 685.06,1772.75 690.75,1772.75 v1(693,1775)
GPIO0-B: U2.2 U4.2 | length 1602.3
  Top Layer w4: v1(434.25,1626.63) 434.25,1623.62 442.55,1615.32 442.55,1600.79 441.61,1599.85 441.61,1585.85 U2.2@440.87,1585.11
  Top Layer w5: v1(673.94,1190) 675.99,1187.94 U4.2@686.22,1187.94 ; U4.2@686.22,1187.99 693,1181.2 U4.2@693,1167.57
  Layer 1 w4: v1(434.25,1626.63) 417,1643.88 417,1687.94 382.94,1722 121.06,1722 62,1662.94 62,1263.37 127.37,1198 139.67,1198 300.37,1198 320.34,1178.04 554.61,1178.04 562.37,1170.28 648.9,1170.28 666.37,1187.75 671.69,1187.75 v1(673.94,1190)
GPIO0-C: U5.2 U7.2 | length 1518.8
  Top Layer w4: v1(432.01,1049.22) 434.26,1046.98 434.26,1041.1 443.41,1031.95 U5.2@443.41,1022.11 ; v1(672.01,613.99) 685.75,613.99 693,606.74 U7.2@693,606.57
  Layer 1 w4: v1(432.01,1049.22) 432.01,1094.62 406.75,1119.87 117.87,1119.87 60,1062 60,698.69 114.69,644 599.06,644 629.75,613.31 671.34,613.31 v1(672.01,613.99)
GPIO0-D: U6.2 U8.2 | length 1616.2
  Top Layer w4: U6.2@446.87,463.11 446.87,502.13 v1(447.74,503)
  Top Layer w5: v1(677,45) 692,45 U8.2@693,46
  Layer 1 w4: v1(447.74,503) 424,526.74 424,587.25 393.34,617.92 273.6,617.92 246.69,591 112,591 57,536 57,191 154.34,93.66 284.62,93.66 365.14,13.15 637.77,13.15 667.5,42.88 674.88,42.88 v1(677,45)
GPIO1-A: U1.3 U3.6 | length 1791
  Top Layer w4: v1(383.75,2136.29) 386,2134.04 397.17,2134.04 397.38,2133.83 404.69,2133.83 423.12,2152.27 U1.3@423.12,2162.11 ; U3.6@740.25,1933.67 U3.6@743,1936.43
  Top Layer w5: v1(736.6,1904) 736.6,1906.91 740.25,1910.56 U3.6@740.25,1933.67
  Layer 1 w4: v1(383.75,2136.29) 383.75,2200.87 398.66,2215.78 398.66,2264.28 377.78,2285.16 110.79,2285.16 71,2245.37 71,1840.69 100.69,1811 277.69,1811 328.56,1760.13 649.81,1760.13 664,1774.32 664,1856 706,1898 728.38,1898 734.38,1904 v1(736.6,1904)
GPIO1-B: U2.3 U4.6 | length 1756.8
  Top Layer w4: U2.3@425.12,1585.11 425.86,1585.85 425.86,1605.13 v1(427.68,1606.95) ; v1(725,1346) 725.37,1346.37 735.75,1346.37 743,1353.62 U4.6@743,1364.43
  Layer 1 w4: v1(427.68,1606.95) 415.37,1594.65 383.7,1594.65 378,1600.34 378,1615.69 401,1638.69 401,1681.31 376.31,1706 127.69,1706 78,1656.31 78,1270 134,1214 307,1214 326.96,1194.04 561.24,1194.04 569,1186.28 642.27,1186.28 651,1195.01 651,1293 685.27,1327.27 721.56,1327.27 725,1330.71 v1(725,1346)
GPIO1-C: U5.3 U7.6 | length 1742.6
  Top Layer w4: v1(427.66,1003.95) U5.3@427.66,1022.11 ; v1(727,776) 729.25,778.25 733.26,778.25 743,787.98 U7.6@743,803.43
  Layer 1 w4: v1(427.66,1003.95) 412.79,989.07 388.93,989.07 381.29,996.71 381.29,1030.85 414,1063.56 414,1090 400.13,1103.87 124.5,1103.87 76,1055.37 76,705.31 121.31,660 605.69,660 636.37,629.31 654.99,629.31 663.97,638.29 663.97,754.92 678.18,769.13 718.78,769.13 725.66,776 v1(727,776)
GPIO1-D: U6.3 U8.6 | length 1799.2
  Top Layer w4: v1(387.78,435.89) 413.74,435.89 431.12,453.27 U6.3@431.12,463.11
  Layer 1 w4: v1(387.78,435.89) 387.78,497.74 387.87,497.84 387.87,507.56 408,527.69 408,580.62 386.71,601.92 280.23,601.92 253.31,575 118.63,575 73,529.37 73,197.63 160.97,109.66 291.25,109.66 371.76,29.15 631.15,29.15 648,46 648,159 690,201 734.78,201 741.78,208 v1(743,208)
GPIO2-A: U1.5 U3.5 | length 1800.7
  Top Layer w4: U1.5@391.62,2162.11 392.36,2162.85 392.36,2184.23 v1(403.13,2194.99)
  Top Layer w5: v1(786.55,1904.29) 786.55,1907.2 793,1913.65 U3.5@793,1936.43
  Layer 1 w4: v1(403.13,2194.99) 403.13,2198.17 406.66,2201.7 406.66,2268.34 381.84,2293.16 107.47,2293.16 63,2248.69 63,1837.37 97.37,1803 272,1803 322.87,1752.13 653.12,1752.13 672,1771 672,1852.69 708.31,1889 744.89,1889 760.18,1904.29 v1(786.55,1904.29)
GPIO2-B: U2.5 U4.5 | length 1778.9
  Top Layer w4: U2.5@393.62,1585.11 393.78,1585.26 393.78,1609.37 v1(393.93,1609.52) ; v1(783.42,1333.84) 783.42,1334.5 793,1344.08 U4.5@793,1364.43
  Layer 1 w4: 136.31,1206 130.69,1206 70,1266.69 70,1659.63 124.37,1714 379.63,1714 409,1684.63 409,1635.37 394.35,1620.72 394.35,1609.94 v1(393.93,1609.52) ; 136.35,1206 303.69,1206 323.65,1186.04 557.93,1186.04 565.68,1178.28 645.58,1178.28 659.06,1191.76 659.06,1289.75 688.58,1319.27 726.3,1319.27 740.87,1333.84 v1(783.42,1333.84)
GPIO2-C: U5.5 U7.5 | length 1754.6
  Top Layer w4: v1(784,774) 784,774.37 793,783.37 U7.5@793,803.43
  Layer 1 w4: v1(396.17,1003.95) 396.17,1034.42 422,1060.25 422,1093.31 403.44,1111.87 121.19,1111.87 68,1058.69 68,702 118,652 602.37,652 633.06,621.31 658.31,621.31 671.97,634.98 671.97,751.6 681.49,761.13 733.16,761.13 746.03,774 v1(784,774)
GPIO2-D: U6.5 U8.5 | length 1839.7
  Top Layer w4: U6.5@399.62,463.11 399.62,490.68 402.72,493.78 v1(402.72,496.96)
  Top Layer w5: v1(793,205) U8.5@793,242.85
  Layer 1 w4: v1(402.72,496.96) 402.72,511.09 416,524.37 416,583.94 390.02,609.92 276.92,609.92 250,583 115.31,583 65,532.69 65,194.31 157.66,101.66 287.94,101.66 368.45,21.15 634.46,21.15 656,42.69 656,155.69 693.31,193 749.03,193 761.03,205 v1(793,205)
GPIO3-A: U1.6 U3.1 | length 1477.7
  Top Layer w4: v1(367.28,2199.75) 367.28,2197.33 375.87,2188.73 U1.6@375.87,2162.11
  Top Layer w5: U3.1@643,1739.57 643.65,1740.22 v1(643.65,1775)
  Layer 1 w4: v1(367.28,2199.75) 390.66,2223.13 390.66,2260.97 374.47,2277.16 114.1,2277.16 79,2242.06 79,1844 104,1819 281,1819 331.87,1768.13 635.43,1768.13 642.31,1775 v1(643.65,1775)
GPIO3-B: U2.6 U4.1 | length 1478.4
  Top Layer w4: v1(377,1565) 377.44,1565.44 377.44,1584.67 U2.6@377.87,1585.11
  Top Layer w5: v1(626,1201.15) 628.06,1199.1 631.16,1199.1 635.94,1194.32 635.94,1174.63 U4.1@643,1167.57
  Layer 1 w4: v1(377,1565) 377,1565.22 369,1573.22 369,1618 393,1642 393,1678 373,1698 131,1698 86,1653 86,1273.31 137.31,1222 310.31,1222 330.28,1202.04 564.55,1202.04 572.31,1194.28 615.95,1194.28 622.82,1201.15 v1(626,1201.15)
GPIO3-C: U5.6 U7.1 | length 1405.8
  Top Layer w4: v1(374.05,1059.19) 374.05,1056.01 380.42,1049.65 U5.6@380.42,1022.11
  Top Layer w5: U7.1@643,606.57 v1(643,645)
  Layer 1 w4: v1(374.05,1059.19) 398.31,1059.19 406,1066.88 406,1086.69 396.81,1095.87 127.82,1095.87 84,1052.06 84,708.63 124.63,668 609,668 631.69,645.31 642.69,645.31 v1(643,645)
GPIO3-D: U6.6 U8.1 | length 1442.5
  Top Layer w4: v1(373,504) 373,500.82 383.87,489.95 U6.6@383.87,463.11
  Top Layer w5: v1(624,45) 642,45 U8.1@643,46
  Layer 1 w4: v1(373,504) 400,531 400,577.31 383.39,593.92 283.54,593.92 256.63,567 121.94,567 81,526.06 81,200.94 164.28,117.66 295.34,117.66 375.85,37.15 615.78,37.15 623.64,45 v1(624,45)
GPIO4-A: U1.8
GPIO4-B: U2.8
GPIO4-C: U5.8
GPIO4-D: U6.8
GPIO5-A: U1.9
GPIO5-B: U2.9
GPIO5-C: U5.9
GPIO5-D: U6.9
GPIO6-A: U1.11
GPIO6-B: U2.11
GPIO6-C: U5.11
GPIO6-D: U6.11
HOT1: J1.P4 LED7.2 | length 1586.9
  Top Layer w5.15: J1.P4@1800.8,278.17 1800.8,183.2 1834.78,149.22 2699.2,149.22 2716.15,166.17 2716.15,237.21 2751.94,273 2915.94,273 2918.48,275.54 2941.54,275.54 2958,292 2958,462 2929.38,490.62 LED7.2@2920,490.62
HOT2: J2.P4 LED5.2 | length 1600.8
  Top Layer w5.15: J2.P4@1800.8,940.49 1800.8,850.2 1839.46,811.54 2853.54,811.54 2883,841 2883,922 2895,934 2945,934 2964,953 2964,1121 2932.05,1152.95 LED5.2@2920,1152.95
HOT3: J4.P4 LED3.2 | length 1598.1
  Top Layer w5.15: J4.P4@1800.8,1603.09 1800.8,1509.2 1837.15,1472.85 2850.85,1472.85 2880,1502 2880,1578 2896.96,1594.96 2944.96,1594.96 2962,1612 2962,1782 2928.73,1815.27 LED3.2@2920,1815.27
HOT4: J5.P4 LED1.2 | length 1583.9
  Top Layer w5.15: J5.P4@1800.8,2265.69 1800.8,2165.2 1831.15,2134.85 2830.79,2134.85 2833.94,2138 2834,2138 2867,2171 2867,2239 2894,2266 2940,2266 2961,2287 2961,2436.6 2935.18,2462.42 2935.18,2462.68 2920.26,2477.6 LED1.2@2920,2477.6
HSD1_N: U6.13 U13.10 | length 2651.1
  Top Layer w5.15: U6.13@257.89,431.61 267,431.61 278.17,420.44 282.68,420.44 288.48,426.24 v1(291,426.24)
  Bottom Layer w5.15: v1(291,426.24) cw(c291,420.16) 295.3,424.46 296.42,423.34 ccw(c303.42,430.34) 303.42,420.44 511.15,420.44 cw(c511.15,376.15) 542.46,407.48 ; 542.47,407.47 ccw(c582.23,447.23) 582.23,391 662.46,391 ccw(c662.46,486.6) 730.03,418.97 ; 730.06,419 ccw(c667.33,481.67) 756,481.67 756,1935.04 cw(c865.07,1935.04) 756,1935.19 cw(c865.07,1935.04) 787.85,2012.06 cw(c865.07,1935.04) 787.94,2012.16 832.99,2057.21 cw(c910.11,1980.08) 833.04,2057.26 cw(c910.11,1980.08) 910.11,2089.15 1055.91,2089.15 ccw(c1055.91,2126.09) 1082.03,2099.97 cw(c1123.14,2058.86) 1123.14,2117 1157.6,2117 ccw(c1157.6,2150.87) 1181.55,2126.92 1249.6,2194.97 ccw(c1245.65,2198.93) 1251.24,2198.93 cw(c1256.83,2198.93) 1252.88,2202.88 U13.10@1260.11,2210.11
HSD1_P: U6.15 U13.9 | length 2658.6
  Top Layer w5.15: U6.15@257.89,400.12 267,400.12 278.17,411.29 282.68,411.29 288.48,405.49 v1(291,405.49)
  Bottom Layer w5.15: v1(291,405.49) ccw(c291,411.57) 295.3,407.27 296.42,408.39 cw(c303.42,401.39) 303.42,411.29 511.04,411.29 cw(c511.04,375.88) 536.05,400.95 ; 536.08,400.92 ccw(c582.16,447.06) 582.16,381.85 662.5,381.85 ccw(c662.5,486.52) 736.51,412.51 736.58,412.58 ccw(c667.42,481.63) 765.15,481.63 765.15,1935.01 cw(c865.15,1935.01) 794.44,2005.72 839.43,2050.71 cw(c910.14,1980) 910.14,2080 1063.49,2080 ccw(c1063.49,2107.79) 1083.14,2088.14 1085.82,2090.82 cw(c1126.93,2049.71) 1126.93,2107.85 1157.64,2107.85 ccw(c1157.64,2150.78) 1187.99,2120.42 1256.07,2188.5 cw(c1260.03,2184.55) U13.9@1259.99,2190.14 ; U13.9@1260.03,2190.14 ccw(c1260.03,2195.73) 1263.98,2191.78 U13.9@1271.22,2199.01
HSD2_N: U5.13 U13.19 | length 2062.3
  Top Layer w5.15: U5.13@254.43,990.61 263.54,990.61 274.71,979.44 279.68,979.44 285.48,985.24 v1(288,985.24)
  Bottom Layer w5.15: v1(288,985.24) cw(c288,979.16) 292.3,983.46 293.42,982.34 ccw(c300.42,989.34) 295.15,980.96 ccw(c300.42,989.34) 300.42,979.44 341.79,979.44 cw(c341.79,922.2) 382.26,962.68 382.99,961.95 ccw(c411.87,990.87) 411.87,950 526.22,950 ccw(c526.22,968.78) 539.5,955.5 ccw(c521.39,973.61) 547,973.61 547,1022.85 cw(c617.22,1022.85) 567.57,1072.51 ccw(c507.17,1132.83) 592.53,1132.83 592.53,1451.71 ccw(c523.1,1451.71) 572.25,1500.75 ccw(c523.1,1451.71) 572.19,1500.81 cw(c623.54,1552.05) 551,1552.05 551,1640.76 cw(c660.07,1640.76) 551,1640.91 cw(c660.07,1640.76) 582.85,1717.79 cw(c660.07,1640.76) 582.94,1717.88 589.76,1724.7 ccw(c519.05,1795.41) 619.05,1795.41 619.05,1940.81 cw(c728.12,1940.81) 619.05,1940.96 cw(c728.12,1940.81) 650.9,2017.83 cw(c728.12,1940.81) 650.99,2017.93 849.27,2216.21 cw(c926.39,2139.08) 849.33,2216.26 cw(c926.39,2139.08) 926.39,2248.15 1012,2248.15 cw(c1012,2207.47) 1040.76,2236.24 1044.5,2232.5 ccw(c1065.02,2253.02) 1065.02,2224 1069,2224 ccw(c1069,2246.3) 1084.77,2230.53 1149.41,2295.17 ccw(c1145.45,2299.12) 1151.05,2299.12 cw(c1156.64,2299.12) U13.19@1152.66,2303.06 ; U13.19@1152.68,2303.08 U13.19@1159.92,2310.31
HSD2_P: U5.15 U13.18 | length 2069.8
  Top Layer w5.15: U5.15@254.43,959.12 263.54,959.12 274.71,970.29 279.68,970.29 285.48,964.49 v1(288,964.49)
  Bottom Layer w5.15: v1(288,964.49) ccw(c288,970.57) 292.3,966.27 293.42,967.39 cw(c300.42,960.39) 300.42,970.29 340.61,970.29 cw(c340.61,919.36) 376.55,955.45 cw(c340.61,919.36) 376.62,955.37 ; 376.62,955.38 ccw(c411.8,990.71) 411.7,940.85 ccw(c411.8,990.71) 411.8,940.85 526.3,940.85 ccw(c526.3,968.6) 545.92,948.98 546.03,949.09 ccw(c521.6,973.52) 556.15,973.52 556.15,1022.79 cw(c617.38,1022.79) 574.08,1066.08 ccw(c507.26,1132.79) 601.68,1132.79 601.68,1451.78 ccw(c523.26,1451.78) 578.75,1507.19 ; 578.69,1507.25 cw(c623.64,1552.09) 560.15,1552.09 560.15,1640.73 cw(c660.15,1640.73) 589.44,1711.44 596.26,1718.26 ccw(c519.13,1795.38) 596.31,1718.31 ccw(c519.13,1795.38) 628.2,1795.38 628.2,1940.78 cw(c728.2,1940.78) 657.49,2011.49 855.71,2209.71 cw(c926.42,2139) 926.42,2239 1008.21,2239 cw(c1008.21,2198.32) 1036.97,2227.09 1040.71,2223.35 ccw(c1061.23,2243.87) 1061.23,2214.85 1072.79,2214.85 ccw(c1072.79,2237.15) 1088.54,2221.36 ; 1088.56,2221.38 1155.88,2288.7 cw(c1159.83,2284.75) U13.18@1159.8,2290.34 ; U13.18@1159.83,2290.34 ccw(c1159.83,2295.93) 1163.78,2291.98 U13.18@1171.02,2299.21
HSD3_N: U2.13 U13.23 | length 1630.3
  Top Layer w5.15: U2.13@251.89,1553.61 261,1553.61 272.17,1542.44 276.68,1542.44 282.48,1548.24 v1(285,1548.24)
  Bottom Layer w5.15: v1(285,1548.24) cw(c285,1542.16) 289.3,1546.46 290.42,1545.34 ccw(c297.42,1552.34) 297.42,1542.44 468.68,1542.44 ccw(c468.68,1585.32) 499,1555 ccw(c477.27,1576.73) 508,1576.73 508,1667.76 cw(c617.07,1667.76) 508,1667.91 cw(c617.07,1667.76) 539.85,1744.79 cw(c617.07,1667.76) 539.94,1744.88 554.22,1759.16 ccw(c483.51,1829.87) 583.51,1829.87 583.51,1948.34 cw(c701.02,1948.34) 617.78,2031.28 804.71,2218.21 ccw(c734,2288.92) 834,2288.92 834,2364.14 cw(c881.81,2364.14) 834,2364.23 cw(c881.81,2364.14) 847.94,2397.88 cw(c881.81,2364.14) 848,2397.94 850.71,2400.65 cw(c895.37,2355.99) 895.37,2419.15 958,2419.15 ccw(c958,2487.26) 1006.13,2439.07 ; 1006.16,2439.1 1035.21,2468.15 ; 1035.24,2468.18 cw(c1061.77,2441.59) 1061.77,2479.15 1077.79,2479.15 cw(c1077.79,2424.14) 1116.68,2463.04 1147.67,2432.05 1178.15,2401.57 ccw(c1182.1,2405.53) U13.23@1182.1,2399.94 ; U13.23@1182.15,2399.94 cw(c1182.1,2394.35) U13.23@1186.03,2398.33 ; U13.23@1186.06,2398.3 U13.23@1193.29,2391.06
HSD3_P: U2.15 U13.22 | length 1635.2
  Top Layer w5.15: U2.15@251.89,1522.12 261,1522.12 272.17,1533.29 276.68,1533.29 282.48,1527.49 v1(285,1527.49)
  Bottom Layer w5.15: v1(285,1527.49) ccw(c285,1533.57) 289.3,1529.27 290.42,1530.39 cw(c297.42,1523.39) 297.42,1533.29 468.78,1533.29 ccw(c468.78,1585.08) 505.4,1548.46 505.49,1548.55 ccw(c477.36,1576.69) 517.15,1576.69 517.15,1667.73 cw(c617.15,1667.73) 546.44,1738.44 560.72,1752.72 ccw(c483.6,1829.84) 560.78,1752.78 ccw(c483.6,1829.84) 592.66,1829.84 592.66,1948.3 592.66,1948.54 cw(c701.02,1948.34) 624.29,2024.85 811.21,2211.76 ccw(c734.08,2288.88) 811.26,2211.82 ccw(c734.08,2288.88) 843.15,2288.88 843.15,2364.1 cw(c881.9,2364.1) 854.48,2391.48 cw(c899.16,2346.84) 899.16,2410 961.79,2410 ccw(c961.79,2478.1) 1009.95,2429.95 1039,2459 ; 1039.03,2459.03 cw(c1065.56,2432.44) 1065.56,2470 1076.83,2470 cw(c1076.83,2421.83) 1110.89,2455.89 1143.88,2422.9 1171.68,2395.1 cw(c1167.73,2391.15) U13.22@1173.32,2391.18 ; U13.22@1173.32,2391.15 ccw(c1178.91,2391.15) 1174.96,2387.2 U13.22@1182.19,2379.96 U13.22@1191.06,2371.09
HSD4_N: U1.13 U13.38 | length 1500.2
  Top Layer w5.15: U1.13@249.89,2130.61 259,2130.61 270.17,2119.44 274.68,2119.44 280.48,2125.24 v1(283,2125.24)
  Bottom Layer w5.15: v1(283,2125.24) cw(c283,2119.16) 287.3,2123.46 ccw(c297,2133.16) 297,2119.44 297.81,2119.44 ccw(c297.81,2150.19) 319.55,2128.45 ccw(c309.18,2138.82) 323.85,2138.82 323.85,2193.79 cw(c389.03,2193.79) 342.94,2239.88 350.05,2246.99 cw(c391.51,2205.54) 350.1,2247.04 cw(c391.51,2205.54) 391.51,2264.16 485.55,2264.16 ccw(c485.55,2364.16) 556.26,2293.45 587.71,2324.9 ccw(c517,2395.61) 617,2395.61 617,2488.76 cw(c726.07,2488.76) 617,2488.91 cw(c726.07,2488.76) 648.85,2565.79 cw(c726.07,2488.76) 648.94,2565.88 694.64,2611.58 cw(c771.76,2534.46) 694.7,2611.64 cw(c771.76,2534.46) 771.76,2643.53 1246.77,2643.53 cw(c1246.77,2586.88) 1286.83,2626.94 1324.42,2589.34 1345.17,2568.59 ccw(c1349.12,2572.55) U13.38@1349.12,2566.95 ; U13.38@1349.16,2566.95 cw(c1349.12,2561.36) U13.38@1353.05,2565.34 ; U13.38@1353.08,2565.32 U13.38@1360.31,2558.08
HSD4_P: U1.15 U13.37 | length 1493.2
  Top Layer w5.15: U1.15@249.89,2099.12 259,2099.12 270.17,2110.29 274.68,2110.29 280.48,2104.49 v1(283,2104.49)
  Bottom Layer w5.15: v1(283,2104.49) ccw(c283,2110.57) v1@287.3,2106.27 ; v1@287.31,2106.29 cw(c297,2096.57) 297,2110.29 301.6,2110.29 ccw(c301.6,2141.04) 323.34,2119.3 326.04,2122 ccw(c309.25,2138.79) 326.09,2122.04 ccw(c309.25,2138.79) 333,2138.79 333,2192.25 cw(c392.75,2192.25) 350.47,2234.47 ; 350.5,2234.5 356.5,2240.5 ; 356.53,2240.53 cw(c391.54,2205.46) 391.54,2255.01 485.59,2255.01 ccw(c485.59,2364.06) 562.7,2286.95 594.21,2318.46 ccw(c517.08,2395.58) 594.26,2318.51 ccw(c517.08,2395.58) 626.15,2395.58 626.15,2488.73 cw(c726.15,2488.73) 655.44,2559.44 701.09,2605.09 cw(c771.8,2534.38) 771.8,2634.38 1246.69,2634.38 cw(c1246.69,2586.69) 1280.38,2620.44 ; 1280.41,2620.41 1315.27,2585.55 1338.7,2562.12 ; 1338.73,2562.1 cw(c1334.75,2558.17) U13.37@1340.34,2558.2 ; U13.37@1340.34,2558.17 ccw(c1345.93,2558.17) 1341.98,2554.22 U13.37@1349.21,2546.98
IN_CC1: J3.A5 U12.1 | length 528.1
  Top Layer w5.15: v1(332.52,2523.65) 332.84,2523.97 343.97,2523.97 359,2539 359,2595 373,2609 654,2609 727.78,2535.22 738.71,2535.22 U12.1@740.07,2533.86
  Bottom Layer w5.15: J3.A5@332.52,2502.35 v1(332.52,2523.65)
IN_CC2: J3.B5 U12.28 | length 906.4
  Top Layer w5.15: v1(273.48,2424.35) 273.48,2453.53 250,2477 199,2477 171.02,2504.98 171.02,2581.02 208.15,2618.15 657.79,2618.15 726.32,2549.62 U12.28@783.37,2549.62
  Bottom Layer w5.15: v1(273.48,2424.35) J3.B5@273.48,2445.65
IN_SSRX1_N: J3.B11 U15.9 | length 348.9
  Top Layer w5.15: v1(508,2385.16) cw(c508,2379.09) 512.3,2383.38 513.42,2382.26 ccw(c520.42,2389.26) 520.42,2379.36 535,2379.36 593,2379.36 593.06,2379.36 ccw(c593.06,2387.52) U15.9@598.82,2381.75 ; U15.9@598.83,2381.76 ccw(c597.31,2383.27) 599.45,2383.27 600.13,2383.95 cw(c601.78,2382.3) 601.78,2384.63 U15.9@608,2384.63
  Bottom Layer w5.15: 371.06,2408.42 ccw(c384.96,2394.54) 365.32,2394.54 365.32,2379.91 ccw(c397.27,2379.91) 374.68,2357.32 ccw(c385.11,2367.75) 385.11,2353 416,2353 ccw(c416,2386.94) 440,2362.94 446.55,2369.49 ; 371.08,2408.43 374.75,2412.1 cw(c397.49,2389.36) 374.79,2412.14 cw(c397.49,2389.36) 382.59,2417.86 383.55,2418.36 ccw(c381.17,2422.93) 386.31,2422.86 ; 386.31,2422.89 cw(c395.3,2422.89) 388.94,2429.23 ccw(c382.59,2435.6) 391.58,2435.6 J3.B11@391.58,2445.66 ; 446.58,2369.52 cw(c470.38,2345.67) 470.38,2379.36 494,2379.36 ccw(c494,2393.09) v1@503.69,2383.37 ; v1@503.7,2383.38 cw(c508,2379.09) v1(508,2385.16)
IN_SSRX1_P: J3.B10 U15.10 | length 361.5
  Top Layer w5.15: v1(508,2364.41) ccw(c508,2370.49) 512.3,2366.19 513.42,2367.31 cw(c520.42,2360.31) 520.42,2370.21 593.06,2370.21 cw(c593.06,2362.06) U15.10@598.81,2367.84 ; U15.10@598.82,2367.82 cw(c597.31,2366.31) 599.45,2366.31 600.13,2365.63 ccw(c601.78,2367.27) 601.78,2364.94 U15.10@608,2364.94
  Bottom Layer w5.15: 364.03,2414.32 ccw(c383.05,2395.34) 356.17,2395.34 356.17,2376.12 ccw(c388.12,2376.12) 365.53,2353.53 368.27,2350.79 ; 364.05,2414.34 368.27,2418.57 cw(c397.49,2389.36) 368.34,2418.63 cw(c397.49,2389.36) 372.93,2422.58 ccw(c369.88,2426.73) 375.03,2426.73 375.03,2428.55 374.53,2429.24 cw(c380.89,2435.6) 371.9,2435.6 J3.B10@371.9,2445.66 ; 368.29,2350.77 ccw(c385.03,2367.55) 385.03,2343.85 419.79,2343.85 ccw(c419.79,2377.79) 443.79,2353.79 453,2363 cw(c470.41,2345.59) 470.41,2370.21 494,2370.21 cw(c494,2356.49) 503.69,2366.21 ccw(c508,2370.49) v1(508,2364.41)